# Altium PCB PCB1.PcbDoc
Units mil, origin at the board's own origin, x right, y up, seen from the top; angles counter-clockwise.
Board outline 6000 x 4000 mil, 2 copper layers (Top Layer, Bottom Layer); 23 components, 29 nets, 136 pads, 9 vias.
Unrouted connection lines stored in the file: 66.
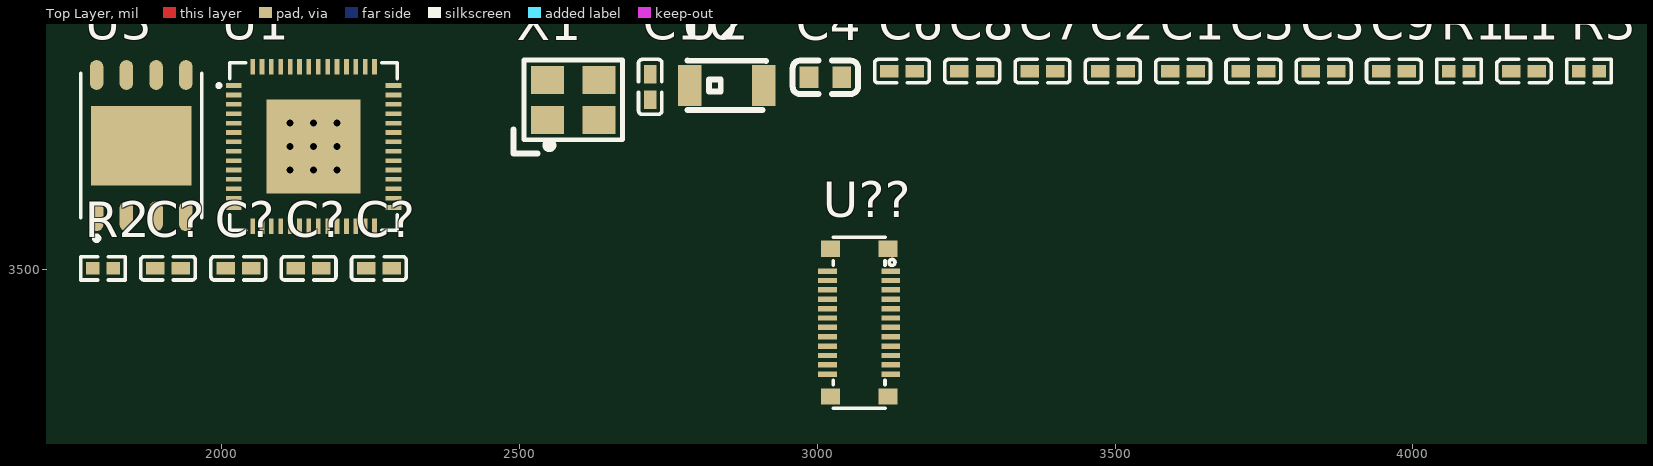
[diagram p0: Top Layer view]
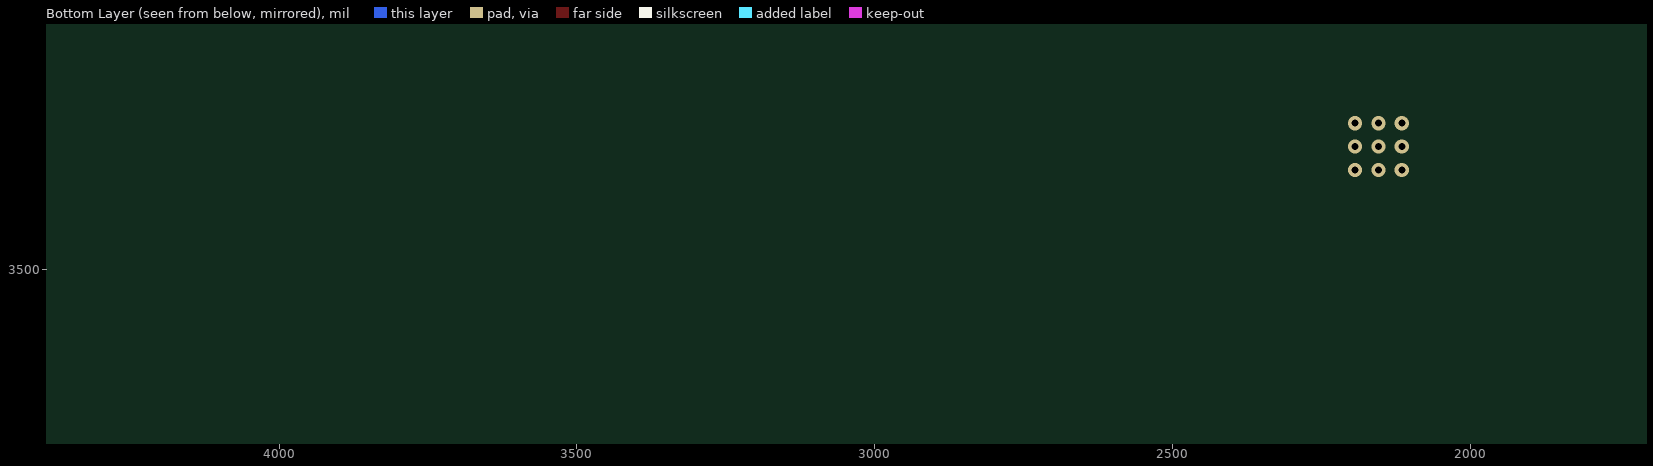
[diagram p1: Bottom Layer view, seen from below]

## Layer stack, top to bottom
Top Solder: solder mask 0.4, Solder Resist, Dk 3.5
Top Layer: signal copper 1.4
Dielectric 1: dielectric 12.6, FR-4, Dk 4.8
Bottom Layer: signal copper 1.4
Bottom Solder: solder mask 0.4, Solder Resist, Dk 3.5

## Board outline
1000,1000 7000,1000 7000,5000 1000,5000

## Design rules (kind name [scope] priority, off if disabled: settings)
Clearance [All] p1: gap=10 ignorepadtopadclearanceinfootprint=FALSE
PolygonConnect [All] p1: connectstyle=Relief reliefconductorwidth=10 reliefentries=4 polygonreliefangle="90 Angle" airgapwidth=10
RoutingVias [All] p1: holewidth=28 width=50 viastyle="Through Hole" minholewidth=28 minwidth=50 maxholewidth=28 maxwidth=50
SolderMaskExpansion [All] p1: expansion=4 istentingtop=FALSE
SupplyNets "Schematic Supply Nets_2" [InNet('VCC_3V3')] p1: voltage=0.000
SupplyNets "Schematic Supply Nets_1" [InNet('GND')] p2: voltage=0.000
SupplyNets "Schematic Supply Nets" [InNet('VDD_SPI')] p3: voltage=0.000
Width [All] p1: maxlimit=10 minlimit=10 preferedwidth=10
30 further rules are at their usual default settings.

## Classes and differential pairs
component class LCD: C? U??
component class ESP32S3: C1 C2 C3 C4 C5 C6 C7 C8 C9 C10 C? L1 R1 R2 R3 U1 U2 U3 X1

## Components (designator, comment, footprint, x,y, rotation, side; value= is the part's Value field where it differs from the comment)
C1 "10pF" C0402 3613.92,3832.37 r0 top
C2 "10pF" C0402 3495.9,3832.37 r0 top
C3 "100nF" C0402 3849.97,3832.37 r0 top
C4 "10uF" C0603 3013.09,3822.04 r0 top
C5 "1uF" C0402 3731.94,3832.37 r0 top
C6 "100nF" C0402 3141.82,3832.37 r0 top
C7 "1uF" C0402 3377.87,3832.37 r0 top
C8 "100nF" C0402 3259.85,3832.37 r0 top
C9 "100nF" C0402 3967.99,3832.37 r0 top
C10 "100nF" C0402 2719.11,3805.99 r90 top
C? "100nF" C0402 2145.41,3501.24 r0 top
C? "100nF" C0402 2263.43,3501.24 r0 top
C? "12pF" C0402 1909.36,3501.24 r0 top
C? "12pF" C0402 2027.39,3501.24 r0 top
L1 "2nH" L0402 4186.37,3832.37 r0 top value=1uH
R1 "0Ω" R0402 4077.18,3832.37 r0 top
R2 "10kΩ" R0402 1800.17,3501.24 r0 top
R3 "10kΩ" R0402 4295.55,3832.37 r0 top
U1 "ESP32S3R8" QFN-56_L7.0-W7.0-P0.40-TL-EP4.0 2153.8,3705.76 r0 top
U2 "ANT3216LL00R2400A" ANT-SMD_L3.2-W1.6 2847.55,3808.27 r0 top
U3 "W25Q16JVZPIQ TR" WSON-8_L6.0-W5.0-P1.27-BL-EP 1859.42,3712.28 r90 top
U?? "OK-14GF024-04_2.1INCH_1" CONN-SMD_24P-P0.40_OK-14GF024-04_2.1INCH 3070,3410 r90 top
X1 "40MHz" OSC-SMD_4P-L3.2-W2.5-BL_SIT8008BI 2589.77,3784.07 r0 top

## Footprints (in the part's own frame and the unit in brackets; to place one, negate y for a bottom-side part, rotate by r counter-clockwise, add the part's x,y. Pads: shape width x height; smd on the part's side, far side on the other; paste and mask are expansions set on the pad)
ANT-SMD_L3.2-W1.6 [mm]
  rect 1x1.75 smd: 1(-1.578,0) 2(1.578,0)
  silkscreen extent -1.68,-1.05 1.68,1.06, body extent -1.6,-0.8 1.6,0.8, height 1.21
C0402 [mm]
  rect 0.79x0.54 smd paste-100 mask+0.051: 1(-0.545,0) 2(0.545,0)
  silkscreen extent -1.17,-0.5 1.17,0.5, body extent -0.5,-0.25 0.5,0.25, height 0.5
C0603 [mm]
  rect 0.8x0.9 smd: 1(-0.7,0) 2(0.7,0)
  silkscreen extent -1.39,-0.71 1.39,0.71, body extent -0.8,-0.4 0.8,0.4, height 0.5
CONN-SMD_24P-P0.40_OK-14GF024-04_2.1INCH [mm]
  rect 0.23x0.8 smd paste+0 mask+0.05: 1(2.2,1.35) 2(1.8,1.35) 3(1.4,1.35) 4(1,1.35) 5(0.6,1.35) 6(0.2,1.35) 7(-0.2,1.35) 8(-0.6,1.35) 9(-1,1.35) 10(-1.4,1.35) 11(-1.8,1.35) 12(-2.2,1.35) 13(-2.2,-1.35) 14(-1.8,-1.35) 15(-1.4,-1.35) 16(-1,-1.35) 17(-0.6,-1.35) 18(-0.2,-1.35) 19(0.2,-1.35) 20(0.6,-1.35) 21(1,-1.35) 22(1.4,-1.35) 23(1.8,-1.35) 24(2.2,-1.35)
  rect 0.7x0.8 smd paste+0 mask+0.05: 25(3.15,1.225) 26(3.15,-1.225) 27(-3.15,1.225) 28(-3.15,-1.225)
  silkscreen extent -3.65,-1.53 3.65,1.1, body extent -3.64,-1.19 3.64,1.19, height 0.8
L0402 [mm]
  rect 0.79x0.54 smd paste-100 mask+0.051: 1(-0.545,0) 2(0.545,0)
  silkscreen extent -1.17,-0.5 1.17,0.5, body extent -0.51,-0.24 0.49,0.26, height 0.5
OSC-SMD_4P-L3.2-W2.5-BL_SIT8008BI [mm]
  rect 1.4x1.2 smd: 1(-1.1,-0.85) 2(1.1,-0.85) 3(1.1,0.85) 4(-1.1,0.85)
  silkscreen extent -2.54,-2.29 2.1,1.7, body extent -1.6,-1.25 1.6,1.25, height 1.2
QFN-56_L7.0-W7.0-P0.40-TL-EP4.0 [mm]
  rect 0.665x0.2 smd paste-100 mask+0.051: 1(-3.408,2.6) 2(-3.408,2.2) 3(-3.408,1.8) 4(-3.408,1.4) 5(-3.408,1) 6(-3.408,0.6) 7(-3.408,0.2) 8(-3.408,-0.2) 9(-3.408,-0.6) 10(-3.408,-1) 11(-3.408,-1.4) 12(-3.408,-1.8) 13(-3.408,-2.2) 14(-3.408,-2.6) 29(3.407,-2.6) 30(3.407,-2.2) 31(3.407,-1.8) 32(3.407,-1.4) 33(3.407,-1) 34(3.407,-0.6) 35(3.407,-0.2) 36(3.407,0.2) 37(3.407,0.6) 38(3.407,1) 39(3.407,1.4) 40(3.407,1.8) 41(3.407,2.2) 42(3.407,2.6)
  rect 0.2x0.665 smd paste-100 mask+0.051: 15(-2.6,-3.408) 16(-2.2,-3.408) 17(-1.8,-3.408) 18(-1.4,-3.408) 19(-1,-3.408) 20(-0.6,-3.408) 21(-0.2,-3.408) 22(0.2,-3.408) 23(0.6,-3.408) 24(1,-3.408) 25(1.4,-3.408) 26(1.8,-3.408) 27(2.2,-3.408) 28(2.6,-3.408) 43(2.6,3.407) 44(2.2,3.407) 45(1.8,3.407) 46(1.4,3.407) 47(1,3.407) 48(0.6,3.407) 49(0.2,3.407) 50(-0.2,3.407) 51(-0.6,3.407) 52(-1,3.407) 53(-1.4,3.407) 54(-1.8,3.407) 55(-2.2,3.407) 56(-2.6,3.407)
  rect 4x4 smd paste-100 mask+0.051: 57(0,0)
  silkscreen extent -4.11,-3.58 3.58,3.58, body extent -3.5,-3.5 3.5,3.5, height 1.02
R0402 [mm]
  rect 0.566x0.54 smd paste-100 mask+0.051: 1(-0.433,0) 2(0.433,0)
  silkscreen extent -0.94,-0.5 0.94,0.5, body extent -0.49,-0.26 0.51,0.24, height 0.35
WSON-8_L6.0-W5.0-P1.27-BL-EP [mil]
  oval 50.22x22.87 smd: 1(-123.61,70) 2(-123.61,20) 3(-123.61,-30) 4(-123.61,-80) 5(113.61,-80) 6(113.61,-30) 7(113.61,20) 8(113.61,70)
  rect 133.86x169.29 smd: 9(-5,-5)
  silkscreen extent -164,-106 116,96, body extent -124,-104 116,93, height 31

## Part data
C1 C2: "50V 10pF C0G ±5% 0402 Ceramic Capacitors ROHS"
C3 C6 C8 C9 C10 C? C?: "50V 100nF X7R ±10% 0402 Ceramic Capacitors ROHS"
C4: "10V 10uF X5R ±10% 0603 Ceramic Capacitors ROHS"
C5 C7: "50V 1uF X5R ±10% 0402 Ceramic Capacitors ROHS"
C? C?: "50V 12pF C0G ±5% 0402 Ceramic Capacitors ROHS"
L1: library part MLG1005S2N0BT000, "L0402 2nH ±0.1nH", Current Rating=4.15A, DC Resistance(DCR)=18mΩ, JLCPCB Part Class="Extended Part", LCSC Part Name="1uH ±30%", Manufacturer=Sunltech(顺磁), Manufacturer Part=SLW4030S1R0NST, Tolerance=±30%, Add into BOM=yes, Convert to PCB=yes, Datasheet=https://item.szlcsc.com/datasheet/SLW4030S1R0NST/207399.html, Device=SLW4030S1R0NST, Supplier=LCSC, Supplier Footprint=SMD,4x4mm, Supplier Part=C206354, Symbol=SLW4030S1R0NST
R1: "0Ω 62.5mW 50V Thick Film Resistor ±1% 0402 Chip Resistor - Surface Mount ROHS"
R2 R3: "62.5mW 10kΩ 50V ±100ppm/℃ Thick Film Resistor ±1% 0402 Chip Resistor - Surface Mount ROHS"
U1: "2.4GHz Wi-Fi + 低功耗蓝牙系统级芯片（SoC）"
U3: "WSON-8-EP(5x6) W25Q128JV（128M位）串行闪存为空间、引脚和电源受限的系统提供了存储解决方案。25Q系列具备灵活性和高性能。"
U??: "OK- 14 0.4mm 24Pin"
X1: library part X322540MPB4SI, "Crystal Oscillator 15pF SMD3225-4P Crystals ROHS"

## Via types
v1: diameter 24, hole 12, Top Layer to Bottom Layer, 9 vias

## Nets (pads, with @x,y where several pads share a name; then routed paths per layer and width w, separated by ;. In a path a pad name is that pad's centre, name@x,y a point inside that pad or via, vN(x,y) a via of type N, cw(c..) or ccw(c..) an arc to the next point about the centre after c; other vN are vias at no path point)
BOOT: R3.1 U1.5
EN: C7.2 R2.1 U1.4
GND: C1.1 C2.1 C3.1 C4.1 C5.1 C6.1 C7.1 C8.1 C9.1 C10.1 C?.1@2005.93,3501.24 C?.1@2123.95,3501.24 C?.1@2241.97,3501.24 C?.2@1930.82,3501.24 U1.57 U3.4 U3.9 U??.1 U??.6 U??.12 U??.25 U??.26 U??.27 U??.28 X1.2 X1.4
  other v1: 2114.43,3666.38 2153.82,3666.4 2193.17,3666.38 2114.44,3705.76 2153.8,3705.75 2193.17,3705.75 2114.44,3745.12 2153.8,3745.12 2193.17,3745.12
I2C_SCL: U1.7 U??.7
I2C_SDA: U1.6 U??.8
LCD_CLK: U1.27 U??.16
LCD_CS: U1.45 U??.13
LCD_DATA0: U1.37 U??.14
LCD_DATA1: U1.51 U??.15
LCD_DATA2: U1.43 U??.18
LCD_DATA3: U1.44 U??.17
LCD_RST: U1.47 U??.21
NetC1_2: C1.2 R1.1 U1.1
NetC2_2: C2.2 R1.2 U2.1
NetL1_2: L1.2 U1.2 U1.3
SPICLK: U1.33 U3.6
SPICS0: U1.32 U3.1
SPID: U1.35 U3.5
SPIHD: U1.30 U3.7
SPIQ: U1.34 U3.2
SPIWP: U1.31 U3.3
TP_INT: U1.19 U??.10
TP_RST: U1.18 U??.9
USB_OTG_N: U1.25
USB_OTG_P: U1.26
VCC_3V3: C3.2 C4.2 C5.2 C6.2 C8.2 C9.2 C?.2@2166.87,3501.24 C?.2@2284.89,3501.24 L1.1 R2.2 R3.2 U1.20 U1.46 U1.55 U1.56 U??.3 U??.4 U??.5 U??.11
VDD_SPI: C10.2 U1.29 U3.8
XTAL_N: C?.1@1887.9,3501.24 U1.53 X1.3
XTAL_P: C?.2@2048.84,3501.24 U1.54 X1.1
pads on no net: U1.8 U1.9 U1.10 U1.11 U1.12 U1.13 U1.14 U1.15 U1.16 U1.17 U1.21 U1.22 U1.23 U1.24 U1.28 U1.36 U1.38 U1.39 U1.40 U1.41 U1.42 U1.48 U1.49 U1.50 U1.52 U2.2 U??.2 U??.19 U??.20 U??.22 U??.23 U??.24